# EAGLE board haptic_glove_0_2 (EAGLE 9.6.2)
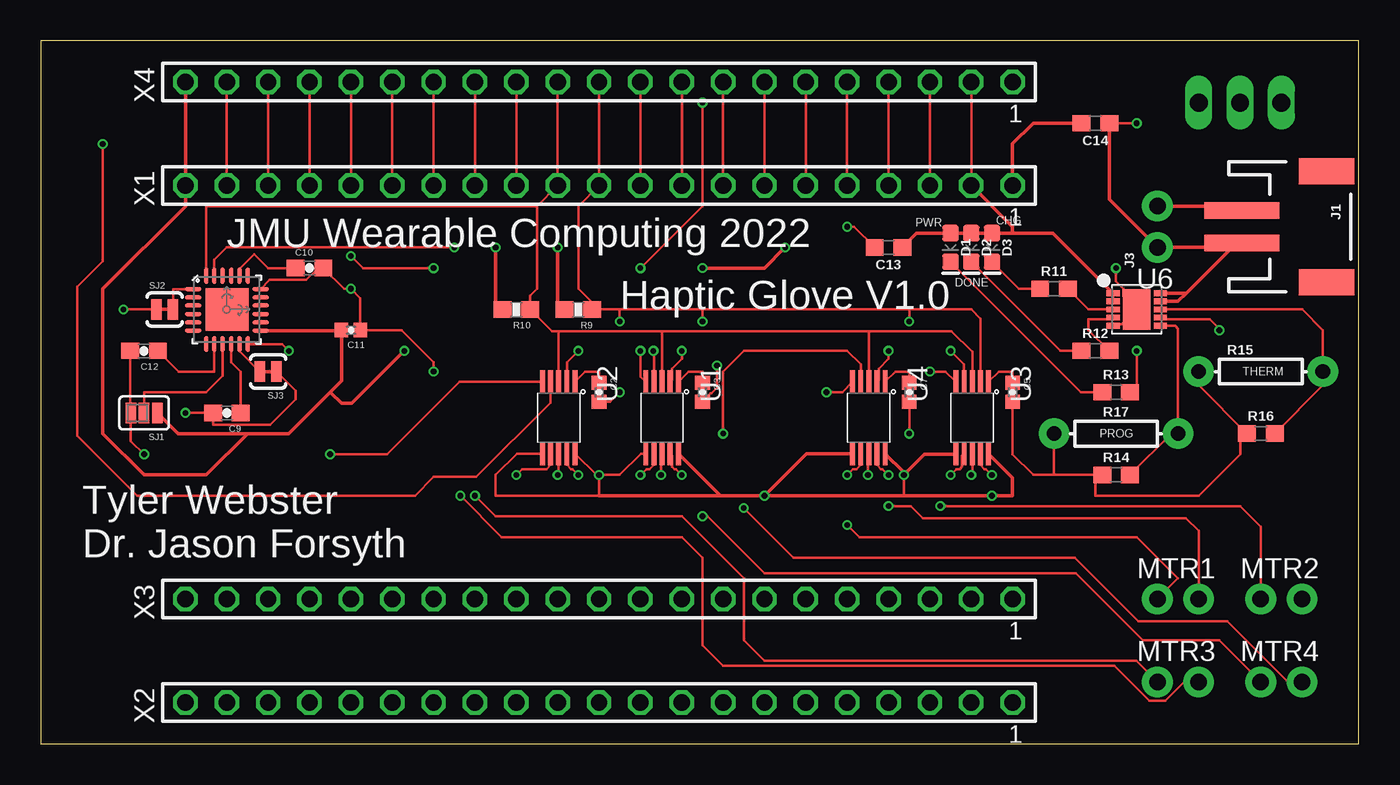
[diagram p0: board, top side]
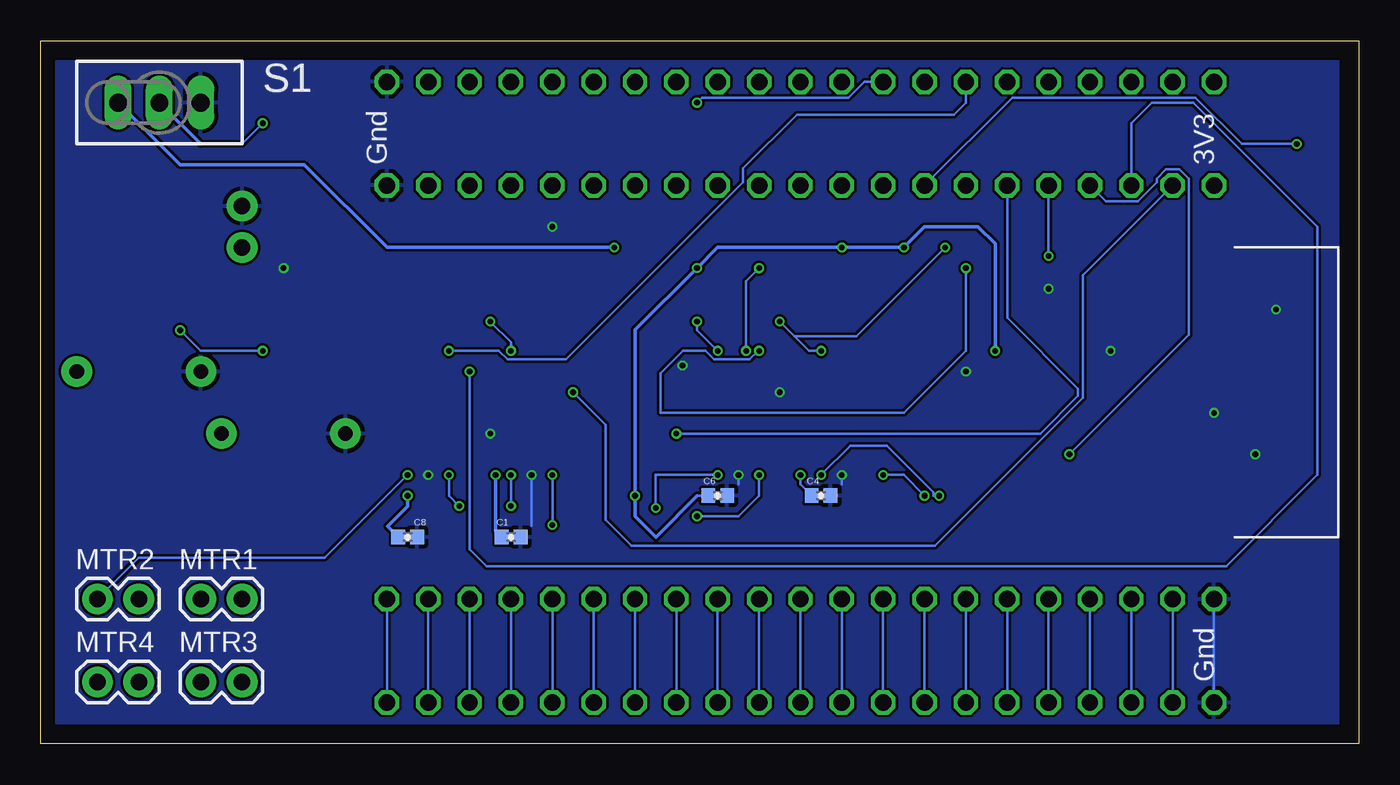
[diagram p1: board, bottom side, seen from below]

Size 80.95 x 43.17 mm. Coordinates in mm from the lower left corner, seen from the top.
Outline: 0,0 80.95,0 80.95,43.17 0,43.17 0,0
Copper layers (1*16): Top 0.035559375mm / dielectric 1.6mm / Bottom 0.035559375mm
Design rules "OSHPark_2_Layer_Rules *": minimum track width 6mil, minimum drill 10mil, track to track 6mil, track to pad 6mil, pad to pad 6mil, via to via 6mil, smd to smd 6mil, copper to edge 15mil, drill to drill 6mil, minimum pad ring 5mil, minimum via ring 5mil, stop-mask expansion 2.5mil, vias tented up to drill 0mil, thermal gap 10mil

## Footprints (pad centres in the part's own frame; a part is rotated, then mirrored left to right if it is on the bottom)
0402-CAP = smd 0.85 x 0.9: 1 -0.58,0; 2 0.58,0
0603-CAP = smd 1.1 x 1: 1 -0.85,0; 2 0.85,0
0603 = smd 1.1 x 1: 1 -0.85,0; 2 0.85,0
LED-0603 = smd 1 x 1: A -0.877,0; C 0.877,0
JST-2-SMD = smd 1 x 4.6: 1 -1,-3.7; 2 1,-3.7 | smd 1.6 x 3.4: NC1 -3.4,1.5; NC2 3.4,1.5
1X02_NO_SILK = drill 1.016 pad 1.88: 1 0,0; 2 2.54,0
1X02@1 = drill 1.016 pad 1.88: 1 0,0; 2 2.54,0
0603-RES = smd 1.1 x 1: 1 -0.85,0; 2 0.85,0
AXIAL-0.3 = drill 0.9 pad 1.88: P$1 -3.81,0; P$2 3.81,0
TL3XPO = drill 1.1 pad 1.422 long: 1 -2.54,0; 2 0,0; 3 2.54,0
SJ_3_PASTE2&3 = smd 0.635 x 1.27: 1 -0.813,0; 2 0,0; 3 0.813,0
SJ_2S-TRACE = smd 0.635 x 1.27: 1 -0.508,0; 2 0.508,0
VSSOP-10 = smd 1.45 x 0.3: P$1 -1.905,1.06; P$2 -1.905,0.56; P$3 -1.905,0.06; P$4 -1.905,-0.44; P$5 -1.905,-0.94; P$6 2.495,-0.94; P$7 2.495,-0.44; P$8 2.495,0.06; P$9 2.495,0.56; P$10 2.495,1.06
QFN-24-4MM2 = smd 1.016 x 0.254: 1 -2.066,1.257; 2 -2.066,0.75; 3 -2.066,0.247; 4 -2.066,-0.287; 5 -2.066,-0.792; 6 -2.066,-1.297; 13 2.086,-1.297; 14 2.086,-0.792; 15 2.086,-0.287; 16 2.086,0.247; 17 2.086,0.75; 18 2.086,1.257 | smd 0.254 x 1.016: 7 -1.267,-2.122; 8 -0.762,-2.122; 9 -0.258,-2.122; 10 0.278,-2.122; 11 0.78,-2.122; 12 1.287,-2.122; 19 1.287,2.082; 20 0.78,2.082; 21 0.278,2.082; 22 -0.258,2.082; 23 -0.762,2.082; 24 -1.267,2.082 | smd 2.616 x 2.616: P$1 0.02,-0.01
DFN-10 = smd 0.8 x 0.35: P$1 -1.45,1; P$2 -1.45,0.5; P$3 -1.45,0; P$4 -1.45,-0.5; P$5 -1.45,-1; P$6 1.45,-1; P$7 1.45,-0.5; P$8 1.45,0; P$9 1.45,0.5; P$10 1.45,1 | smd 1.7 x 2.5: P$11 0,0
TSW-121-XX-G-S = drill 1 pad 1.5 octagon: 1 25.4,0; 2 22.86,0; 3 20.32,0; 4 17.78,0; 5 15.24,0; 6 12.7,0; 7 10.16,0; 8 7.62,0; 9 5.08,0; 10 2.54,0; 11 0,0; 12 -2.54,0; 13 -5.08,0; 14 -7.62,0; 15 -10.16,0; 16 -12.7,0; 17 -15.24,0; 18 -17.78,0; 19 -20.32,0; 20 -22.86,0; 21 -25.4,0

## Placement (x,y rotation side)
C1  1.0uF  [0402-CAP]  52.07,12.7 0 bottom
C2  1.0uF  [0402-CAP]  34.29,21.59 270 top
C3  1.0uF  [0402-CAP]  40.64,21.59 270 top
C4  1.0uF  [0402-CAP]  33.02,15.24 0 bottom
C5  1.0uF  [0402-CAP]  59.69,21.59 270 top
C6  1.0uF  [0402-CAP]  39.37,15.24 0 bottom
C7  1.0uF  [0402-CAP]  53.34,21.59 270 top
C8  1.0uF  [0402-CAP]  58.42,12.7 0 bottom
C9  0.1uF  [0603-CAP]  11.43,20.32 180 top
C10  2.2nF  [0603-CAP]  16.51,29.21 0 top
C11  0.1uF  [0402-CAP]  19.05,25.4 180 top
C12  10nF  [0603-CAP]  6.35,24.13 180 top
C13  10uF  [0603]  52.07,30.48 180 top
C14  10uF  [0603]  64.77,38.1 180 top
D1  RED  [LED-0603]  55.88,30.48 270 top
D2  GREEN  [LED-0603]  57.15,30.48 270 top
D3  Yellow  [LED-0603]  58.42,30.48 270 top
J1  [JST-2-SMD]  77.47,31.75 270 top
J3  [1X02_NO_SILK]  68.58,30.48 90 top
MTR1  [1X02@1]  71.12,8.89 0 bottom
MTR2  [1X02@1]  77.47,8.89 0 bottom
MTR3  [1X02@1]  71.12,3.81 0 bottom
MTR4  [1X02@1]  77.47,3.81 0 bottom
R9  2.2k  [0603-RES]  33.02,26.67 180 top
R10  2.2k  [0603-RES]  29.21,26.67 180 top
R11  1.5k  [0603]  62.23,27.94 0 top
R12  1.5k  [0603]  64.77,24.13 0 top
R13  1.5k  [0603]  66.04,21.59 0 top
R14  1k  [0603]  66.04,16.51 0 top
R15  THERM  [AXIAL-0.3]  74.93,22.86 0 top
R16  10k  [0603]  74.93,19.05 0 top
R17  PROG  [AXIAL-0.3]  66.04,19.05 0 top
S1  TL32PO  [TL3XPO]  73.66,39.37 0 bottom
SJ1  [SJ_3_PASTE2&3]  6.35,20.32 180 top
SJ2  [SJ_2S-TRACE]  7.62,26.67 0 top
SJ3  [SJ_2S-TRACE]  13.97,22.86 180 top
U1  DRV2605L  [VSSOP-10]  38.1,20.32 270 top
U2  DRV2605L  [VSSOP-10]  31.75,20.32 270 top
U3  DRV2605L  [VSSOP-10]  57.15,20.32 270 top
U4  DRV2605L  [VSSOP-10]  50.8,20.32 270 top
U5  MPU-6050-1  [QFN-24-4MM2]  11.43,26.67 0 top
U6  MCP73833  [DFN-10]  67.31,26.67 0 top
X1  TSW-121-07-G-S  [TSW-121-XX-G-S]  34.29,34.29 0 top
X2  TSW-121-07-G-S  [TSW-121-XX-G-S]  34.29,2.54 0 top
X3  TSW-121-07-G-S  [TSW-121-XX-G-S]  34.29,8.89 0 top
X4  TSW-121-07-G-S  [TSW-121-XX-G-S]  34.29,40.64 0 top

## Library data of the parts
C1-C8 C11 = SparkFun-Capacitors; PROD_ID: CAP-12417
C9 C10 C12 R9 R10 SJ1-SJ3 = SparkFun
C13 C14 = SparkFun-Capacitors; PROD_ID: CAP-11015
D1 = SparkFun-LED; PROD_ID: DIO-00819
D2 = SparkFun-LED; PROD_ID: DIO-00821
D3 = SparkFun-LED; PROD_ID: DIO-09003
J1 = SparkFun-Connectors; PROD_ID: CONN-11443; SF_ID: PRT-08612
J3 MTR1-MTR4 = SparkFun-Connectors
R11-R13 = SparkFun-Resistors; PROD_ID: RES-08306
R14 = SparkFun-Resistors; PROD_ID: RES-07856
R15 R17 = SparkFun-Resistors
R16 = SparkFun-Resistors; PROD_ID: RES-00824
S1 = switch
U1-U4 = SparkFun-PowerIC; PROD_ID: IC-13504
U5 = Testing
U6 = SparkFun-IC-Power; PROD_ID: IC-14369
X1-X4 = con-samtec; MF: Samtec Inc.; MPN: TSW-121-07-G-S

## Nets
ADO: SJ1.2 U5.9
CLKIN: SJ2.2 U5.1
FSYNC: SJ3.2 U5.11
GND: C1.2 C2.2 C3.2 C4.2 C5.2 C6.2 C7.2 C8.2 C9.2 C10.2 C11.1 C12.2 C13.2 C14.2 J1.1 J3.2 R14.1 R15.P$1 R16.1 R17.P$1 S1.3 SJ1.3 SJ2.1 SJ3.1 U1.P$8 U2.P$8 U3.P$8 U4.P$8 U5.12 U5.18 U6.P$5 U6.P$11 X1.1 X2.21 X3.21 X4.1
N$1: X2.1 X3.1
N$2: X2.2 X3.2
N$3: C3.1 U1.P$1
N$4: U1.P$4 X1.13 X4.13
N$5: U1.P$5 X1.17 X4.17
N$6: MTR4.1 U1.P$9
N$7: MTR4.2 U1.P$7
N$10: C2.1 U2.P$1
N$11: U2.P$4 X1.14 X4.14
N$12: U2.P$5 X1.18 X4.18
N$13: MTR3.1 U2.P$9
N$14: MTR3.2 U2.P$7
N$17: X2.3 X3.3
N$18: X2.4 X3.4
N$19: C5.1 U3.P$1
N$20: U3.P$4 X1.15 X4.15
N$21: U3.P$5 X1.19 X4.19
N$22: MTR2.1 U3.P$9
N$23: MTR2.2 U3.P$7
N$26: X2.5 X3.5
N$27: X2.6 X3.6
N$28: C7.1 U4.P$1
N$29: U4.P$4 X1.16 X4.16
N$30: U4.P$5 X1.20 X4.20
N$31: MTR1.1 U4.P$9
N$32: MTR1.2 U4.P$7
N$35: X2.7 X3.7
N$36: X2.8 X3.8
N$37: C10.1 U5.20
N$38: C9.1 U5.10
N$39: X2.9 X3.9
N$40: X2.10 X3.10
N$41: X2.11 X3.11
N$42: X2.12 X3.12
N$43: X2.13 X3.13
N$44: X2.14 X3.14
N$45: X2.15 X3.15
N$46: X2.16 X3.16
N$47: X2.17 X3.17
N$48: X2.18 X3.18
N$49: X2.19 X3.19
N$50: X2.20 X3.20
N$51: C14.1 J1.2 J3.1 S1.2 U6.P$9 U6.P$10
N$52: X1.10 X4.10
N$53: X1.9 X4.9
N$54: X1.8 X4.8
N$55: X1.7 X4.7
N$56: X1.6 X4.6
N$57: X1.5 X4.5
N$58: X1.4 X4.4
N$59: X1.3 X4.3
N$60: C13.1 D1.A D2.A D3.A U6.P$1 U6.P$2 X1.2 X4.2
N$61: D1.C R13.1
N$62: D2.C R12.1
N$63: D3.C R11.1
PG: R13.2 U6.P$7
PROG: R14.2 R17.P$2 U6.P$6
SCL: R9.1 U1.P$2 U2.P$2 U3.P$2 U4.P$2 U5.23 X1.11 X4.11
SDA: R10.1 U1.P$3 U2.P$3 U3.P$3 U4.P$3 U5.24 X1.12 X4.12
STAT1: R11.2 U6.P$3
STAT2: R12.2 U6.P$4
THERM: R15.P$2 R16.2 U6.P$8
VCC: C1.1 C4.1 C6.1 C8.1 C11.2 R9.2 R10.2 S1.1 SJ1.1 U1.P$6 U1.P$10 U2.P$6 U2.P$10 U3.P$6 U3.P$10 U4.P$6 U4.P$10 U5.13 X1.21 X4.21
VIO: C12.1 U5.8

## Tracks (layer width: path | path; a pad name or v marks a point on that pad's centre or on a via)
ADO
  Top 0.152: U5.9 11.17,22.6 10.16,21.59 6.35,21.59 SJ1.2
CLKIN
  Top 0.152: SJ2.2 8.13,27.93 U5.1
FSYNC
  Top 0.152: SJ3.2 12.21,24.11 U5.11
GND  (via drill 0.35)
  Top 0.152: 62.23,16.51 60.96,16.51 59.69,17.78 C5.2 | 62.23,16.51 R14.1 64.77,16.09 64.77,15.24 71.12,15.24 73.66,17.78 73.66,19.05 R16.1 71.12,22.01 R15.P$1 | C12.2 5.5,20.36 SJ1.3 5.54,18.59 v6.35,17.78 | U5.18 14.07,28.48 16.3,28.48 17.03,29.21 C10.2 18.63,27.94 v19.05,27.94 19.63,27.36 C11.1 22.17,25.4 24.13,23.44 v24.13,22.86 | U6.P$5 65.96,25.77 66.36,25.77 67.26,26.67 U6.P$11 66.49,27.49 66.49,27.94 66.04,28.39 v66.04,29.21 | SJ3.1 15.66,21.67 15.66,21.17 14.09,19.59 10.58,19.59 C9.2 v8.89,20.32 | C2.2 34.98,21.01 v35.56,21.59 | U2.P$8 31.81,16.57 v31.75,16.51 | U1.P$8 38.1,17.77 v38.1,16.51 | C3.2 41.15,21.52 41.19,21.52 41.53,21.87 v41.53,23.23 | U4.P$8 50.8,17.77 v50.8,16.51 | C7.2 v53.34,19.05 | U3.P$8 57.21,16.57 v57.15,16.51 | C13.2 49.95,31.75 v49.53,31.75 | U5.12 14.82,24.55 v15.24,24.13 | 62.23,16.51 R17.P$1 | SJ2.1 v5.08,26.67
  Top 0.203: X1.1 59.69,36.83 60.96,38.1 C14.2 | J3.2 73.5,33.02 J1.1
  Bottom 0.152: X3.21 X2.21 | v50.8,16.51 50.8,13.39 | 38.1,15.93 v38.1,16.51 | 31.75,15.93 v31.75,16.51
  pour Bottom: 1.27,41.91 80.01,41.91 80.01,1.27 1.27,1.27
N$1
  Bottom 0.152: X3.1 X2.1
N$2
  Bottom 0.152: X3.2 X2.2
N$3
  Top 0.152: C3.1 40.64,22.86 39.8,22.86 U1.P$1
N$4  (via drill 0.35)
  Top 0.152: X4.13 X1.13 | U1.P$4 37.66,24.1 v37.63,24.13 | v36.83,29.21 40.64,33.02 v40.64,39.37
  Bottom 0.152: v37.63,24.13 37.63,28.41 v36.83,29.21 | v40.64,39.37 40.35,39.66 31.35,39.66 30.37,40.64 X4.13
N$5  (via drill 0.35)
  Top 0.152: U1.P$5 36.83,22.55 v36.83,24.13 | v24.13,29.21 19.79,29.21 v19.05,29.95 | X4.17 X1.17
  Bottom 0.152: v36.83,24.13 36.88,24.13 37.41,23.6 39.59,23.6 40.12,24.13 41.49,24.13 42.88,22.74 42.88,20.32 27.94,20.32 24.13,24.13 v24.13,29.21 | v19.05,29.95 X1.17
N$6  (via drill 0.35)
  Top 0.152: U1.P$9 38.78,17.7 38.78,17 38.92,16.87 39.01,16.87 v39.37,16.51 | MTR4.1 76.58,3.81 72.87,7.52 67.41,7.52 63.5,11.43 46.23,11.43 v43.18,14.48
  Bottom 0.152: v43.18,14.48 43.18,16.51 v39.37,16.51
N$7  (via drill 0.35)
  Top 0.152: v36.83,16.51 37.19,16.87 37.41,16.87 37.66,17.13 U1.P$7 | v40.64,13.97 40.94,13.97 44.45,10.46 63.58,10.46 67.69,6.35 72.39,6.35 MTR4.2
  Bottom 0.152: v36.83,16.51 36.83,15.24 38.1,13.97 v40.64,13.97
N$10
  Top 0.152: C2.1 34.29,22.86 33.44,22.86 U2.P$1
N$11  (via drill 0.35)
  Top 0.152: X4.14 X1.14 | v3.81,36.83 3.81,29.64 2.23,28.07 2.23,18.92 5.92,15.24 22.98,15.24 24.13,16.39 26.75,16.39 31.31,20.95 U2.P$4
  Bottom 0.152: v3.81,36.83 7.19,36.83 10.03,39.67 21.29,39.67 X1.14
N$12  (via drill 0.35)
  Top 0.152: X4.18 X1.18 | U2.P$5 25.73,22.23 21.29,17.78 v17.78,17.78
  Bottom 0.152: X1.18 15.53,33.31 13.57,33.31 12.41,34.47 12.41,34.7 11.84,35.27 11.02,35.27 10.45,34.7 10.45,25.11 v17.78,17.78
N$13  (via drill 0.35)
  Top 0.152: v33.02,16.51 32.66,16.87 32.56,16.87 32.31,17.13 U2.P$9 | MTR3.1 70.23,3.81 69.06,2.64 68.1,2.64 65.95,4.79 41.91,4.79 40.64,6.06 40.64,11.43 39.37,12.7 28.31,12.7 v25.77,15.24
  Bottom 0.152: v25.77,15.24 26.14,15.24 26.14,15.46 28.99,18.31 31.22,18.31 v33.02,16.51
N$14  (via drill 0.35)
  Top 0.152: v29.21,16.51 29.57,16.87 31.05,16.87 31.31,17.13 U2.P$7 | v26.67,15.24 27.94,13.97 39.37,13.97 43.18,10.16 43.18,6.35 44.44,5.09 67.3,5.09 MTR3.2
  Bottom 0.152: v29.21,16.51 27.94,16.51 v26.67,15.24
N$17
  Bottom 0.152: X3.3 X2.3
N$18
  Bottom 0.152: X3.4 X2.4
N$19
  Top 0.152: C5.1 59.69,22.86 58.84,22.86 U3.P$1
N$20  (via drill 0.35)
  Top 0.152: U3.P$4 56.71,23.3 v55.88,24.13 | X4.15 X1.15
  Bottom 0.152: v55.88,24.13 52.82,24.13 52.29,23.6 48.68,23.6 37.81,34.47 37.81,35.33 34.51,38.63 24.87,38.63 24.13,39.37 X4.15
N$21  (via drill 0.35)
  Top 0.152: U3.P$5 55.58,22.86 v54.61,22.86 | X1.19 X4.19
  Bottom 0.152: v54.61,22.86 54.61,11.95 53.56,10.9 8.15,10.9 2.54,16.51 2.54,31.75 10.16,39.37 12.7,39.37 13.97,38.1 X1.19
N$22  (via drill 0.35)
  Top 0.152: v58.42,16.51 58.06,16.87 57.97,16.87 57.71,17.13 U3.P$9
  Bottom 0.152: v58.42,16.51 63.5,11.43 74.93,11.43 MTR2.1
N$23  (via drill 0.35)
  Top 0.152: U3.P$7 56.59,17.7 56.59,17 56.45,16.87 56.24,16.87 v55.88,16.51 | v55.25,14.6 73.66,14.6 74.93,13.33 MTR2.2
  Bottom 0.152: v55.88,16.51 55.88,15.24 v55.25,14.6
N$26
  Bottom 0.152: X3.5 X2.5
N$27
  Bottom 0.152: X3.6 X2.6
N$28
  Top 0.152: C7.1 53.34,22.86 52.5,22.86 U4.P$1
N$29  (via drill 0.35)
  Top 0.152: U4.P$4 50.36,23.3 49.53,24.13 43.18,24.13 41.91,22.86 v41.91,19.05 | X4.16 X1.16
  Bottom 0.152: X1.16 21.59,26.15 17.25,21.81 17.25,21.37 19.57,19.05 v41.91,19.05
N$30  (via drill 0.35)
  Top 0.152: U4.P$5 49.23,21.59 v48.26,21.59 | X4.20 X1.20
  Bottom 0.152: X1.20 16.94,28.77 16.94,21.24 26.02,12.17 44.67,12.17 46.25,13.75 46.25,19.58 v48.26,21.59
N$31  (via drill 0.35)
  Top 0.152: MTR1.1 71.12,13.08 70.33,13.87 54.18,13.87 53.44,14.6 v52.07,14.6 | v52.07,16.51 51.71,16.87 51.62,16.87 51.36,17.13 U4.P$9
  Bottom 0.152: v52.07,14.6 v52.07,16.51
N$32  (via drill 0.35)
  Top 0.152: MTR1.2 69.85,10.16 67.31,12.7 50.27,12.7 v49.53,13.44 | v49.53,16.51 49.89,16.87 50.11,16.87 50.36,17.13 U4.P$7
  Bottom 0.152: v49.53,13.44 v49.53,16.51
N$35
  Bottom 0.152: X3.7 X2.7
N$36
  Bottom 0.152: X3.8 X2.8
N$37
  Top 0.152: C10.1 13.97,29.21 13.11,30.07 12.21,29.16 U5.20
N$38
  Top 0.152: U5.10 11.71,23.43 12.28,22.86 C9.1
N$39
  Bottom 0.152: X3.9 X2.9
N$40
  Bottom 0.152: X3.10 X2.10
N$41
  Bottom 0.152: X3.11 X2.11
N$42
  Bottom 0.152: X3.12 X2.12
N$43
  Bottom 0.152: X3.13 X2.13
N$44
  Bottom 0.152: X3.14 X2.14
N$45
  Bottom 0.152: X3.15 X2.15
N$46
  Bottom 0.152: X3.16 X2.16
N$47
  Bottom 0.152: X3.17 X2.17
N$48
  Bottom 0.152: X3.18 X2.18
N$49
  Bottom 0.152: X3.19 X2.19
N$50
  Bottom 0.152: X3.20 X2.20
N$51  (via drill 0.35)
  Top 0.152: 73.66,30.75 J1.2 | v67.31,38.1 C14.1
  Top 0.203: C14.1 65.62,33.44 J3.1 73.39,30.48 73.66,30.75 | 70.35,27.67 73.43,30.75 J1.2 | 70.35,27.67 69.85,27.17 U6.P$9 | U6.P$10 70.35,27.67
  Bottom 0.152: 71.12,36.83 68.58,36.83 v67.31,38.1
  Bottom 0.203: S1.2 71.12,36.83
N$52
  Top 0.152: X4.10 X1.10
N$53
  Top 0.152: X4.9 X1.9
N$54
  Top 0.152: X4.8 X1.8
N$55
  Top 0.152: X4.7 X1.7
N$56
  Top 0.152: X4.6 X1.6
N$57
  Top 0.152: X4.5 X1.5
N$58
  Top 0.152: X4.4 X1.4
N$59
  Top 0.152: X4.3 X1.3
N$60
  Top 0.152: U6.P$2 U6.P$1 | X1.2 X4.2
  Top 0.203: C13.1 53.8,31.36 D1.A D2.A D3.A 59.69,31.36 | X1.2 59.69,31.75 59.69,31.36 | 59.69,31.36 62.17,31.36 U6.P$1
N$61
  Top 0.152: D1.C 63.89,21.59 R13.1
N$62
  Top 0.152: D2.C 62.62,24.13 R12.1
N$63
  Top 0.152: D3.C 60.08,27.94 R11.1
PG  (via drill 0.35)
  Top 0.152: v67.31,24.13 67.31,22.01 R13.2 | U6.P$7 68.86,26.07 71.8,26.07 72.47,25.4 v72.39,25.4
  Bottom 0.152: v67.31,24.13 71.12,24.13 v72.39,25.4
PROG
  Top 0.152: U6.P$6 69.67,25.67 69.85,25.49 R17.P$2 69.43,19.05 R14.2
SCL  (via drill 0.35)
  Top 0.152: R9.1 34.29,26.67 | 34.29,26.67 35.56,26.67 | 40.64,26.67 53.34,26.67 | 53.34,26.67 57.15,26.67 57.71,26.11 U3.P$2 | v33.02,24.13 32.31,23.42 U2.P$2 | 40.64,26.67 v40.64,25.93 | U1.P$2 38.78,22.35 38.78,23.04 39.37,23.63 v39.37,24.13 | U4.P$2 51.48,22.35 51.48,23.04 52.07,23.63 v52.07,24.13 | v53.34,25.93 53.34,26.67 | X4.11 X1.11 33.02,33.02 33.02,27.94 34.29,26.67 | v35.56,25.93 35.56,26.67 | 35.56,26.67 40.64,26.67 | v25.4,30.48 11.43,30.48 10.67,29.72 U5.23
  Bottom 0.152: v35.56,25.93 34.66,25.03 | 34.66,25.03 33.76,24.13 v33.02,24.13 | v40.64,25.93 40.64,25.4 v39.37,24.13 | v52.07,24.13 52.07,24.66 v53.34,25.93 | 34.66,25.03 30.85,25.03 v25.4,30.48
SDA
  Top 0.152: U3.P$3 57.21,24.07 55.94,25.34 50.86,25.34 | U2.P$3 31.81,25.34 | U1.P$3 38.16,25.34 | U4.P$3 50.86,25.34 | X4.12 X1.12 30.48,33.02 | 30.48,33.02 30.48,27.94 30.06,27.52 R10.1 31.39,25.34 31.81,25.34 | U5.24 10.16,30.48 10.16,33.02 30.48,33.02 | 31.81,25.34 38.16,25.34 | 38.16,25.34 50.86,25.34
STAT1
  Top 0.152: R11.2 64.35,26.67 U6.P$3
STAT2
  Top 0.152: U6.P$4 65.76,26.07 64.35,26.07 64.35,25.4 R12.2
THERM
  Top 0.152: R16.2 78.74,22.01 R15.P$2 78.74,25.4 77.47,26.67 U6.P$8
VCC  (via drill 0.35)
  Top 0.152: 31.75,27.09 R9.2 | 27.94,26.67 R10.2 | 53.01,16.68 v53.01,16.51 53.01,15.24 | U2.P$6 29.25,17.82 27.94,16.51 27.94,15.24 34.29,15.24 v34.29,16.51 | U1.P$6 36.88,17.82 35.56,16.51 v34.29,16.51 | v34.29,16.51 34.12,16.51 U2.P$10 | C11.2 18.44,25.37 | U3.P$6 56.17,17.78
  Top 0.203: v31.75,30.48 31.75,27.09 | v27.94,30.48 27.94,26.67 | SJ1.1 8.43,19.05 12.7,19.05 | 12.7,19.05 15.24,19.05 17.78,21.59 | 12.7,19.05 10.16,16.51 6.35,16.51 3.81,19.05 3.81,27.94 8.89,33.02 X1.21 X4.21 | v44.45,15.24 41.75,15.24 | 41.75,15.24 U1.P$10 | v44.45,15.24 47.03,17.82 U4.P$6 | U4.P$10 53.01,16.68 | v44.45,15.24 53.01,15.24 v58.42,15.24 59.69,15.24 59.69,16.34 U3.P$10 | 41.75,15.24 34.29,15.24 | v22.33,24.13 19.1,20.9 18.47,20.9 17.78,21.59 | 18.44,25.37 U5.13 | v53.01,16.51 54.28,17.78 56.17,17.78 | 17.78,21.59 18.47,22.28 C11.2 | v45.72,30.48 44.45,29.21 v40.64,29.21
  Bottom 0.152: 53.01,13.06 C1.1 | C6.1 40.63,15.24 | C4.1 34.29,15.93 v34.29,16.51
  Bottom 0.203: v22.33,24.13 22.33,30.7 23.38,31.75 26.67,31.75 v27.94,30.48 v31.75,30.48 39.38,30.48 v40.64,29.21 44.45,25.41 v44.45,15.24 44.45,13.97 43.17,12.69 40.63,15.24 | v53.01,16.51 53.01,13.06 | C8.1 59.65,13.35 58.42,14.59 v58.42,15.24 | v45.72,30.48 59.69,30.48 64.77,35.56 72.39,35.56 S1.1
VIO
  Top 0.152: C12.1 8.47,22.86 10.67,22.86 U5.8

## Text on the board
_tsilk: PWR | CHG | JMU Wearable Computing 2022 | DONE | Haptic Glove V1.0 | THERM | PROG | Tyler Webster / Dr. Jason Forsyth | MTR1 | MTR2 | MTR3 | MTR4
_bsilk: 3V3 | Gnd | Gnd